# Altium PCB ComboCamera_OV2640.PcbDoc (part 1 of 2)
Units mm, origin at the board's own origin, x right, y up, seen from the top; angles counter-clockwise.
Board outline 54.59 x 25.9 mm, 4 copper layers (L1, L2, L3, L4), stack 1.562 mm thick; 63 components, 49 nets, 203 pads, 112 vias.
Unrouted connection lines stored in the file: 172.
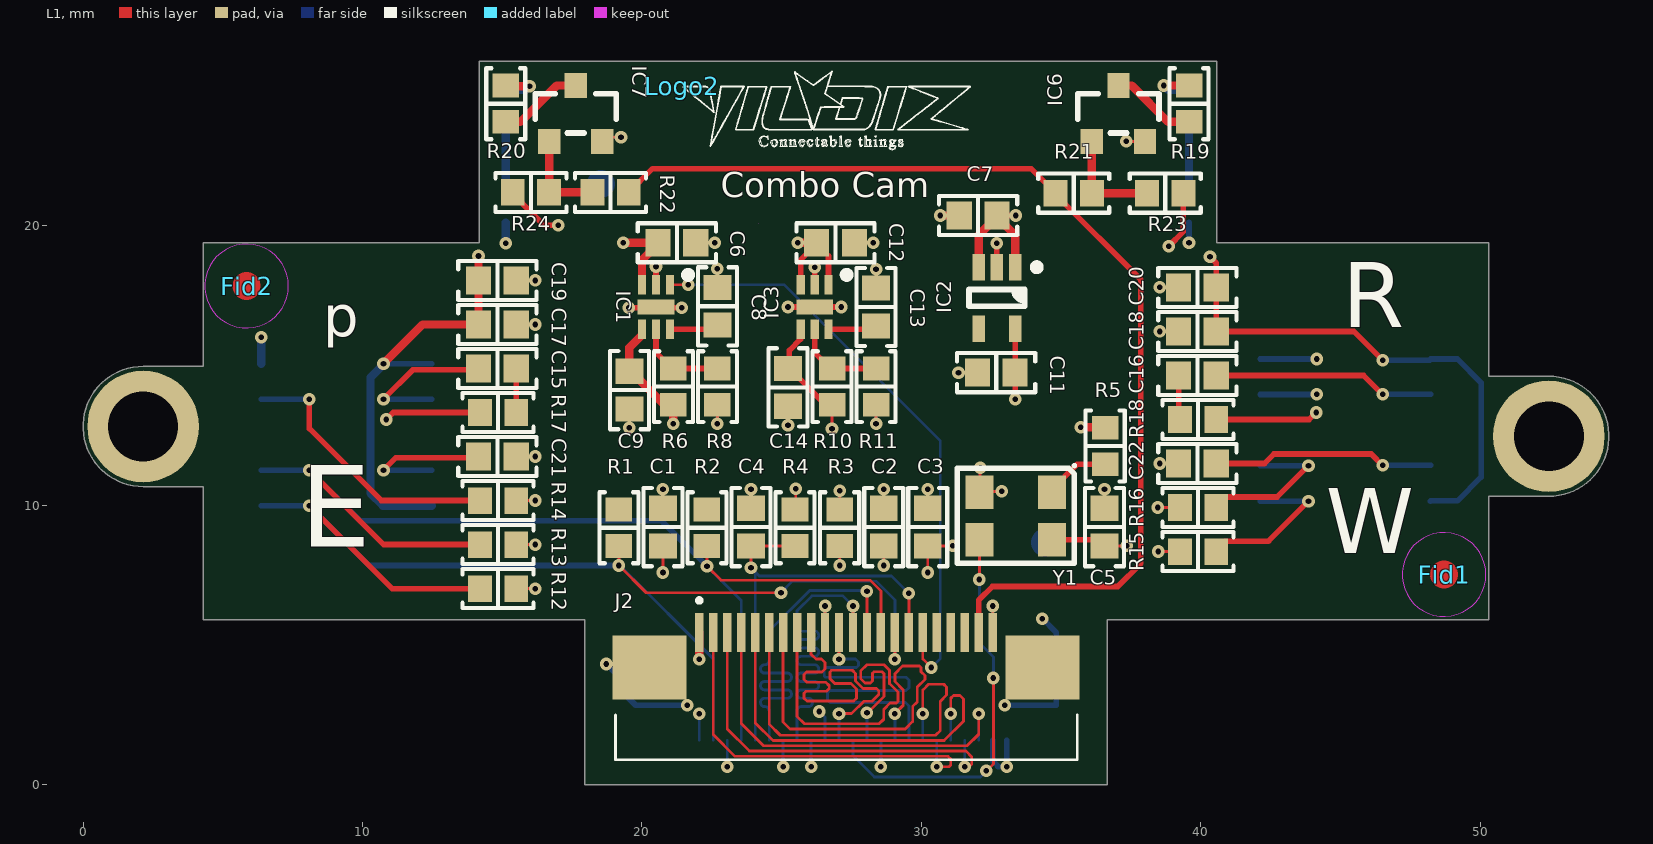
[diagram p0: L1 view]
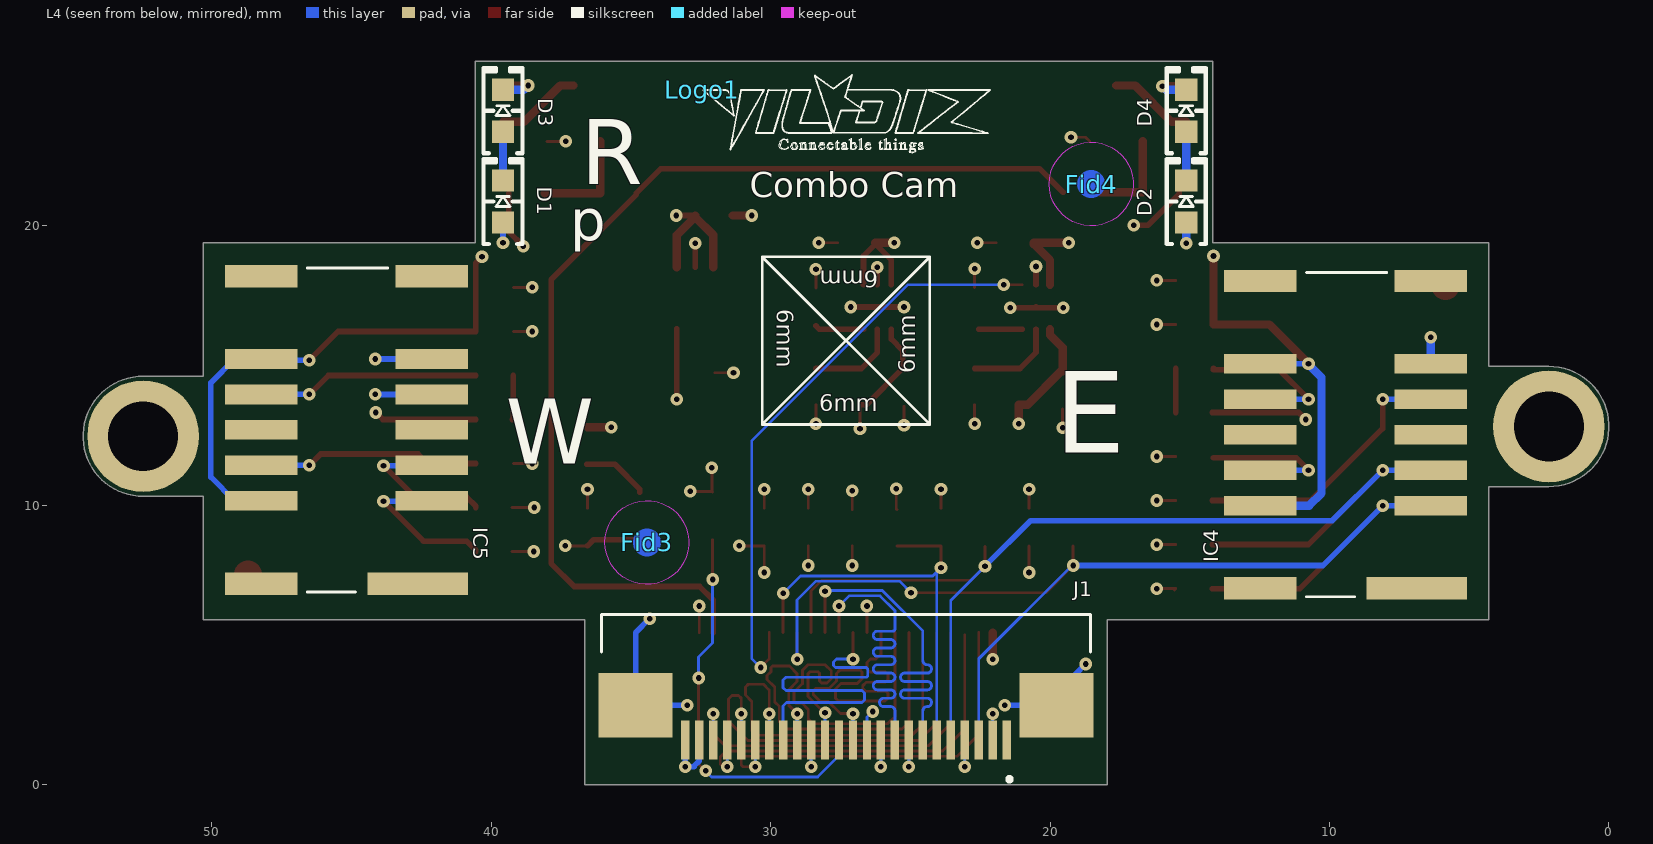
[diagram p1: L4 view, seen from below]
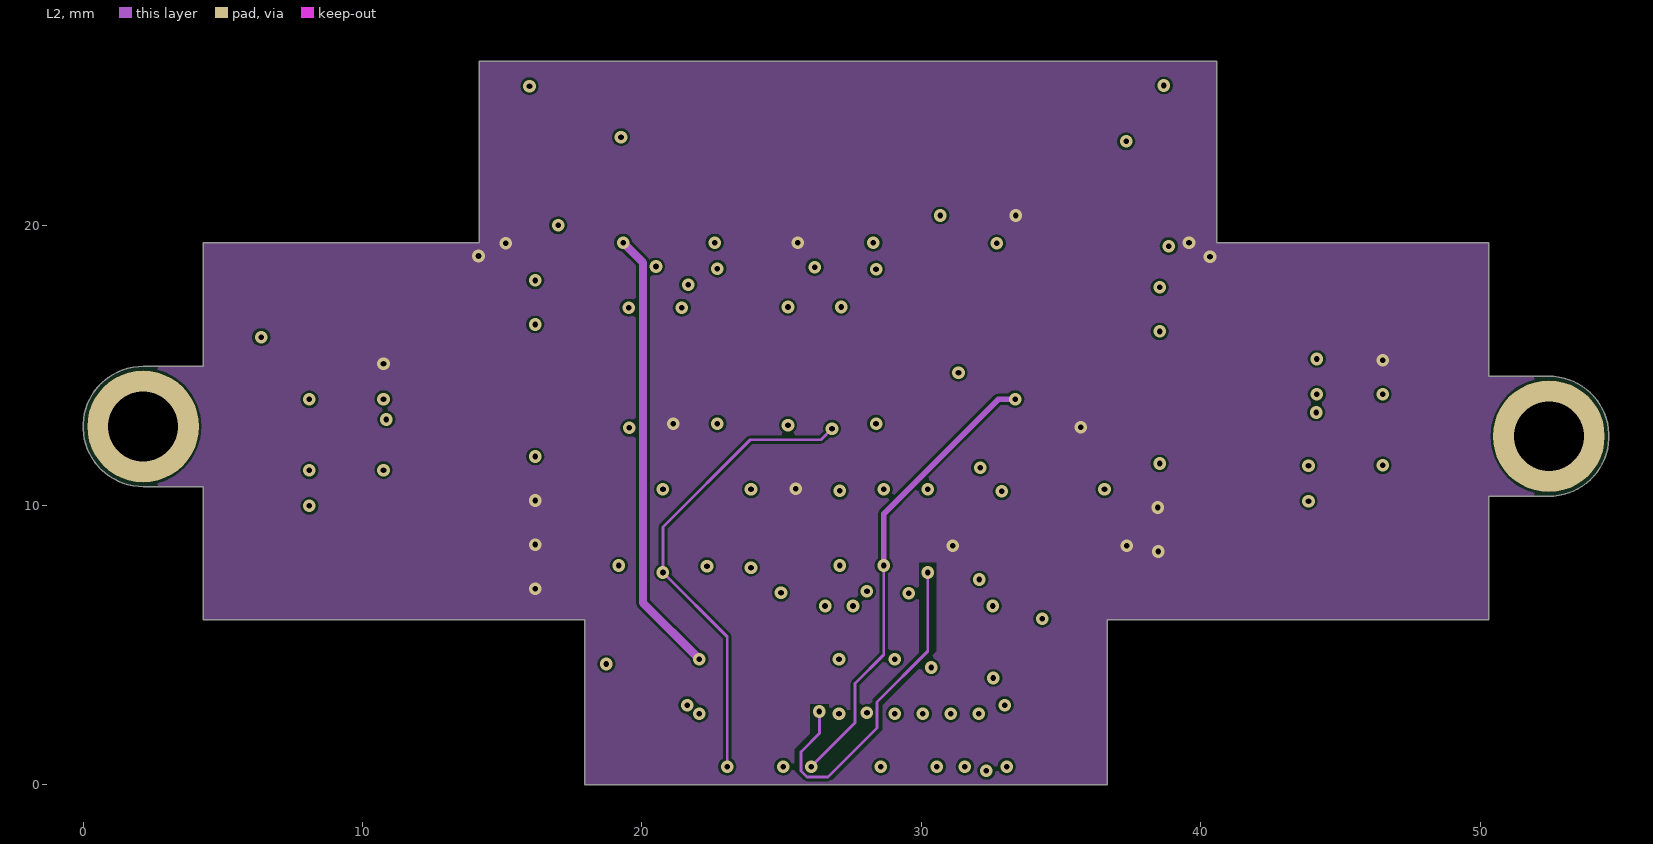
[diagram p2: L2]
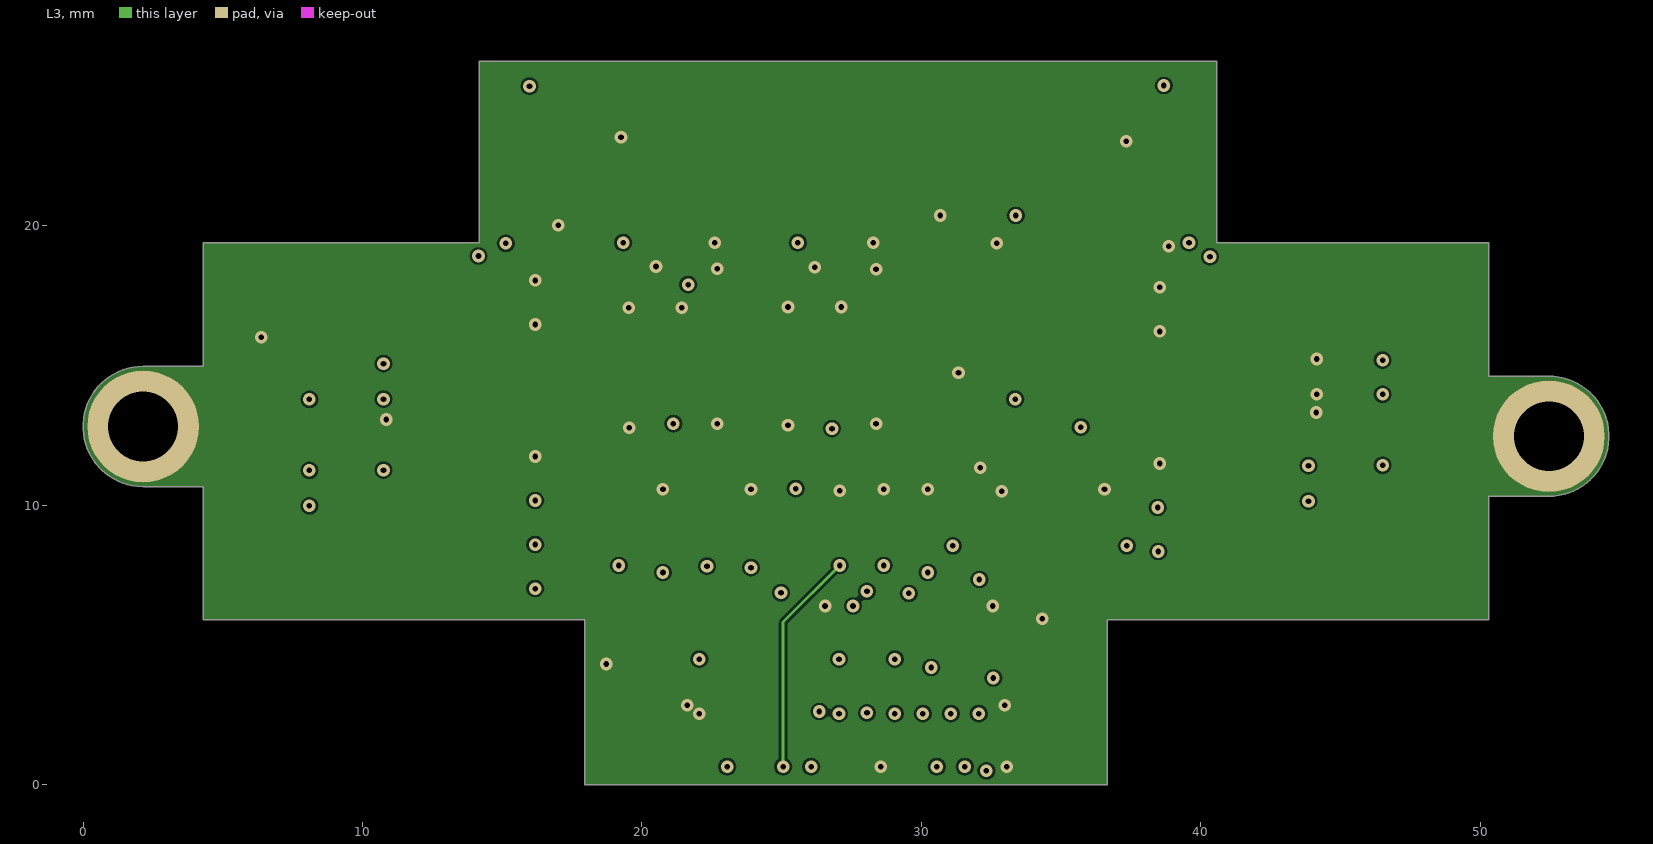
[diagram p3: L3]
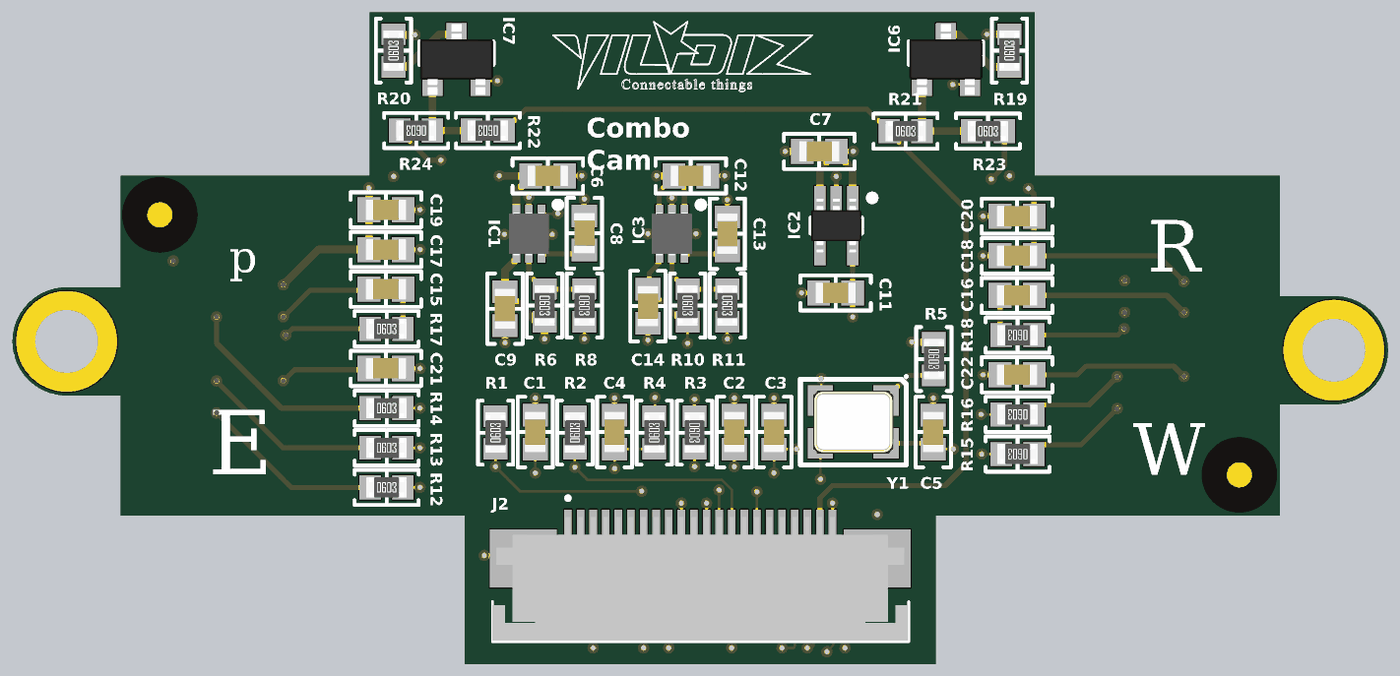
[diagram p4: 3D render of the assembled board from above, using the file's embedded part models]
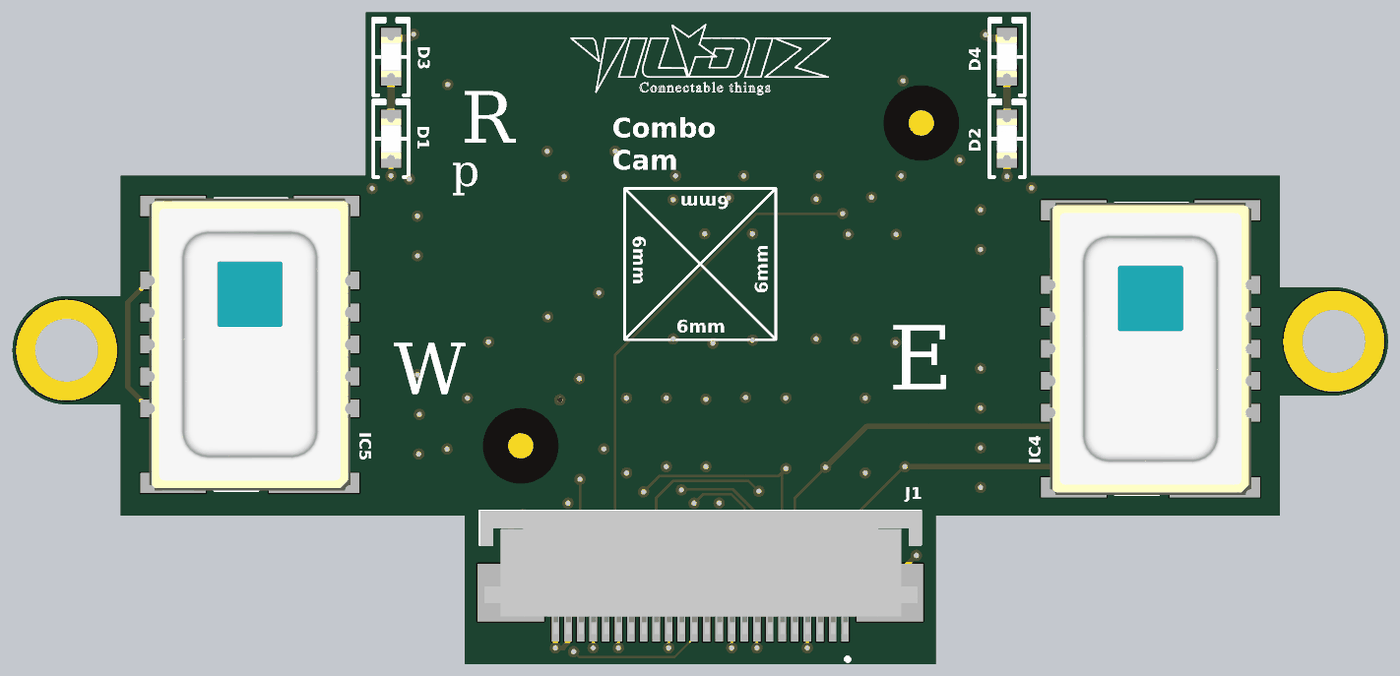
[diagram p5: 3D render of the assembled board from below, using the file's embedded part models]

## Layer stack, top to bottom
Top Solder: solder mask 0.0102, Solder Resist, Dk 3.5
L1: signal copper 0.035
Prepreg 1: prepreg 0.1, 2313, Dk 4.05
L2: signal copper 0.0175
Core 1: core 0.565, Core-009, Dk 4.5
Prepreg 2: prepreg 0.127, 2116, Dk 4.25
Core 2: core 0.565, Core-009, Dk 4.5
L3: signal copper 0.0175
Prepreg 3: prepreg 0.1, 2313, Dk 4.05
L4: signal copper 0.035
Bottom Solder: solder mask 0.0102, Solder Resist, Dk 3.5

## Board outline
4.3,5.9 4.3,10.675 2.15,10.675 cw(c2.15,12.825) 2.15,14.975 4.3,14.975 4.3,19.4 14.175,19.4 14.175,25.9 40.575,25.9 40.575,19.4 50.3,19.4 50.3,14.625 52.45,14.625 cw(c52.45,12.475) 52.45,10.325 50.3,10.325 50.3,5.9 36.65,5.9 36.65,0 17.95,0 17.95,5.9

## Design rules (kind name [scope] priority, off if disabled: settings)
Clearance [All] p1: gap=0.089 ignorepadtopadclearanceinfootprint=FALSE
ComponentClearance [All] p1: gap=0 collisioncheckmode=3 verticalgap=0 showdistances=FALSE
MatchedLengths "Schematic Matched Net Lengths" [InNetClass('DCMI')] p1: tolerance=2.54 checknetsindiffpair=FALSE checkdiffpairvsdiffpair=TRUE checkxsignals=TRUE checkothers=TRUE
PolygonConnect [All] p1: connectstyle=Direct reliefconductorwidth=0.254 reliefentries=4 polygonreliefangle="90 Angle" airgapwidth=0.254
RoutingVias [All] p1: holewidth=0.2 width=0.45 viastyle="Through Hole" minholewidth=0.2 minwidth=0.45 maxholewidth=5 maxwidth=5
SolderMaskExpansion [All] p1: expansion=0.05
Width [All] p1: maxlimit=10 minlimit=0.089 preferedwidth=0.2
29 further rules are at their usual default settings.

## Classes and differential pairs
component class ComboCamera_OV2640: Fid1 Fid2 Fid3 Fid4 Logo1 Logo2
net class DCMI: DCMI_D0 DCMI_D1 DCMI_D2 DCMI_D3 DCMI_D4 DCMI_D5 DCMI_D6 DCMI_D7 DCMI_HSYNC DCMI_PIXCK DCMI_VSYNC
net class DCMI_D[0..7]: DCMI_D0 DCMI_D1 DCMI_D2 DCMI_D3 DCMI_D4 DCMI_D5 DCMI_D6 DCMI_D7
net class D[0..7]: D0 D1 D2 D3 D4 D5 D6 D7
component class "U_Thermal Camera": C15 C16 C17 C18 C19 C20 C21 C22 IC4 IC5 R12 R13 R14 R15 R16 R17 R18
component class U_Power: C6 C7 C8 C9 C11 C12 C13 C14 IC1 IC2 IC3 R6 R8 R10 R11
component class U_LED: D1 D2 D3 D4 IC6 IC7 R19 R20 R21 R22 R23 R24
component class U_Expansion: J2
component class "U_Digital Camera": C1 C2 C3 C4 C5 J1 R1 R2 R3 R4 R5 Y1

## Components (designator, comment, footprint, x,y, rotation, side; value= is the part's Value field where it differs from the comment)
C1 "100nF" "CAP 0603/1608" 20.75,9.225 r270 top
C2 "100nF" "CAP 0603/1608" 28.65,9.225 r270 top
C3 "100nF" "CAP 0603/1608" 30.225,9.225 r270 top
C4 "100nF" "CAP 0603/1608" 23.9,9.225 r270 top
C5 "100nF" "CAP 0603/1608" 36.55,9.225 r270 top
C6 "1uF" "CAP 0603/1608" 21.25,19.4 r180 top
C7 "1uF" "CAP 0603/1608" 32.025,20.375 r0 top
C8 "100nF" "CAP 0603/1608" 22.7,17.125 r270 top
C9 "1uF" "CAP 0603/1608" 19.55,14.125 r90 top
C11 "1uF" "CAP 0603/1608" 32.675,14.75 r0 top
C12 "1uF" "CAP 0603/1608" 26.925,19.4 r180 top
C13 "100nF" "CAP 0603/1608" 28.375,17.1 r270 top
C14 "1uF" "CAP 0603/1608" 25.225,14.225 r90 top
C15 "1uF" "CAP 0603/1608" 14.825,14.9 r180 top
C16 "1uF" "CAP 0603/1608" 39.875,14.65 r0 top
C17 "100nF" "CAP 0603/1608" 14.825,16.475 r0 top
C18 "100nF" "CAP 0603/1608" 39.875,16.225 r180 top
C19 "10uF" "CAP 0603/1608" 14.825,18.05 r180 top
C20 "10uF" "CAP 0603/1608" 39.875,17.8 r0 top
C21 "1.5uF" "CAP 0603/1608" 14.825,11.75 r0 top
C22 "1.5uF" "CAP 0603/1608" 39.875,11.5 r180 top
D1 "#NAME?" "LED 0603/1608" 39.575,20.875 r90 bottom
D2 "#NAME?" "LED 0603/1608" 15.125,20.875 r90 bottom
D3 "#NAME?" "LED 0603/1608" 39.575,24.125 r90 bottom
D4 "#NAME?" "LED 0603/1608" 15.125,24.125 r90 bottom
Fid1 "Fiducial mark" Fiducial 48.7,7.525 r0 top
Fid2 "Fiducial mark" Fiducial 5.85,17.85 r90 top
Fid3 "Fiducial mark" Fiducial 34.425,8.675 r90 bottom
Fid4 "Fiducial mark" Fiducial 18.525,21.5 r90 bottom
IC1 "#NAME?" "MICREL MLF-6 1.6x1.6MM" 20.5,17.1 r270 top
IC2 "#NAME?" "MICROCHIP SC70-5 LT" 32.7,17.425 r270 top
IC3 "#NAME?" "MICREL MLF-6 1.6x1.6MM" 26.175,17.1 r270 top
IC4 "#NAME?" "PANASONIC AMG8853" 9.425,12.53 r90 bottom locked
IC5 "#NAME?" "PANASONIC AMG8853" 45.175,12.7 r90 bottom locked
IC6 "#NAME?" "DIODES SOT-23-3" 37.05,24.025 r90 top
IC7 "#NAME?" "DIODES SOT-23-3" 17.625,24.025 r90 top
J1 "#NAME?" "Amphenol SFV24R-1STE1HLF" 27.3,4 r0 bottom locked
J2 "#NAME?" fpc-22 27.3,4.825 r0 top locked
Logo1 "Logo symbol" LOGO_YILDIZIOT 32.45,24.875 r180 bottom
Logo2 "Logo symbol" LOGO_YILDIZIOT 21.434,24.998 r0 top
R1 "1.5kR" "RES 0603/1608" 19.175,9.2 r90 top
R2 "1.5kR" "RES 0603/1608" 22.325,9.2 r90 top
R3 "10kR" "RES 0603/1608" 27.075,9.2 r270 top
R4 "10kR" "RES 0603/1608" 25.475,9.2 r90 top
R5 "10kR" "RES 0603/1608" 36.575,12.125 r270 top
R6 "14kR" "RES 0603/1608" 21.125,14.25 r270 top
R8 "10kR" "RES 0603/1608" 22.7,14.25 r270 top
R10 "12.4kR" "RES 0603/1608" 26.8,14.25 r270 top
R11 "10kR" "RES 0603/1608" 28.375,14.25 r270 top
R12 "10kR" "RES 0603/1608" 14.85,7.025 r0 top
R13 "10kR" "RES 0603/1608" 14.85,8.6 r0 top
R14 "10kR" "RES 0603/1608" 14.85,10.175 r0 top
R15 "10kR" "RES 0603/1608" 39.9,8.35 r180 top
R16 "10kR" "RES 0603/1608" 39.9,9.925 r180 top
R17 "20R" "RES 0603/1608" 14.85,13.325 r0 top
R18 "20R" "RES 0603/1608" 39.9,13.075 r180 top
R19 "10R" "RES 0603/1608" 39.575,24.375 r90 top
R20 "10R" "RES 0603/1608" 15.125,24.375 r90 top
R21 "220R" "RES 0603/1608" 35.45,21.175 r0 top
R22 "220R" "RES 0603/1608" 18.875,21.2 r180 top
R23 "10kR" "RES 0603/1608" 38.725,21.175 r0 top
R24 "10kR" "RES 0603/1608" 16.025,21.2 r180 top
Y1 "24MHz" "Abracon ASTX-11" 33.375,9.625 r180 top

## Footprints (in the part's own frame and the unit in brackets; to place one, negate y for a bottom-side part, rotate by r counter-clockwise, add the part's x,y. Pads: shape width x height; smd on the part's side, far side on the other; paste and mask are expansions set on the pad)
"Abracon ASTX-11" [mm] "Crystal, 4-Leads, Body 2.50x3.20mm, Pitch 2.38mm, IPC Medium Density"
  rect 1x1.2 smd: 1(-1.3,-0.85) 2(1.3,-0.85) 3(1.3,0.85) 4(-1.3,0.85)
  silkscreen extent -2.15,-1.85 2.1,1.7, body extent -1.61,-1.26 1.61,1.26, height 0.9
"Amphenol SFV24R-1STE1HLF" [mm]
  rect 0.3x1.4 smd: 1(-5.75,2.4) 2(-5.25,2.4) 3(-4.75,2.4) 4(-4.25,2.4) 5(-3.75,2.4) 6(-3.25,2.4) 7(-2.75,2.4) 8(-2.25,2.4) 9(-1.75,2.4) 10(-1.25,2.4) 11(-0.75,2.4) 12(-0.25,2.4) 13(0.25,2.4) 14(0.75,2.4) 15(1.25,2.4) 16(1.75,2.4) 17(2.25,2.4) 18(2.75,2.4) 19(3.25,2.4) 20(3.75,2.4) 21(4.25,2.4) 22(4.75,2.4) 23(5.25,2.4) 24(5.75,2.4)
  rect 2.65x2.3 smd: MP1(-7.525,1.15) MP2(7.525,1.15)
  silkscreen extent -8.75,-2.1 8.75,3.85, body extent -8.78,-2.1 8.72,2.8, height 1.85
"CAP 0603/1608" [mm] "Chip Capacitor, 2-Leads, Body 1.60x0.80mm, IPC Medium Density"
  rect 0.9x1 smd: 1(-0.675,0) 2(0.675,0)
  silkscreen extent -1.4,-0.7 1.4,0.7, body extent -0.8,-0.41 0.8,0.41, height 0.82
"DIODES SOT-23-3" [mm] "SOT23, 3-Leads, Body 2.90x2.40mm, Pitch 0.95mm, IPC Medium Density"
  rect 0.9x0.8 smd: 1(-1,0.95) 2(-1,-0.95) 3(1,0)
  silkscreen extent -0.7,-1.45 0.7,1.45, body extent -1.41,-1.45 1.41,1.45, height 1.5
Fiducial [mm] "Electrolitic Radial Capacitor, 5mm pin space, 0.8mm Hole, 10.1mm diametre, 15.2 height"
  L1 circle w1: c0,0 r0
  L1 keep-out circle w0.01: c0,0 r1.5
fpc-22 [mm] "SFV22R-2STE1HLF"
  rect 0.3x1.4 smd: 1(-5.25,0.625) 2(-4.75,0.625) 3(-4.25,0.625) 4(-3.75,0.625) 5(-3.25,0.625) 6(-2.75,0.625) 7(-2.25,0.625) 8(-1.75,0.625) 9(-1.25,0.625) 10(-0.75,0.625) 11(-0.25,0.625) 12(0.25,0.625) 13(0.75,0.625) 14(1.25,0.625) 15(1.75,0.625) 16(2.25,0.625) 17(2.75,0.625) 18(3.25,0.625) 19(3.75,0.625) 20(4.25,0.625) 21(4.75,0.625) 22(5.25,0.625)
  rect 2.65x2.3 smd: MP1(-7.025,-0.625) MP2(7.025,-0.625)
  silkscreen extent -8.25,-3.93 8.27,1.82, body extent -8.25,-3.88 8.25,1.02, height 1.82
"LED 0603/1608" [mm] "Chip Diode, 2-Leads, Body 1.60x0.80mm, IPC Medium Density"
  rect 0.8x0.8 smd: 1(-0.75,0) 2(0.75,0)
  silkscreen extent -1.52,-0.7 1.52,0.7, body extent -0.8,-0.4 0.8,0.4, height 0.53
LOGO_YILDIZIOT [mm] "YýLDýZ IoT Logo"
  silkscreen extent 0.02,-2.27 10.31,0.53
"MICREL MLF-6 1.6x1.6MM" [mm] "6-UFDFN Exposed Pad, 6-TMLF®"
  rect 0.7x0.3 smd: 1(-0.8,0.5) 2(-0.8,0) 3(-0.8,-0.5) 4(0.8,-0.5) 5(0.8,0) 6(0.8,0.5)
  rect 0.55x1.31 smd: 7(0,0)
  silkscreen extent -1.27,1.03 -1.03,1.28, body extent -0.85,-0.8 0.85,0.8, height 0.6
"MICROCHIP SC70-5 LT" [mm] "SC70, 5-Leads, Body 2.03x2.10mm, Pitch 0.65mm, IPC Medium Density"
  rect 0.95x0.45 smd: 1(-1.1,0.65) 2(-1.1,0) 3(-1.1,-0.65) 4(1.1,-0.65) 5(1.1,0.65)
  silkscreen extent -1.22,-1 0.3,1.55, body extent -1.06,-1 1.06,1, height 1.1
"PANASONIC AMG8853" [mm]
  rect 0.8x3.6 smd: 1(-5.5,-2.55)
  rect 0.7x2.6 smd: 2(-2.54,-3.05) 3(-1.27,-3.05) 4(0,-3.05) 5(1.27,-3.05) 6(2.54,-3.05) 9(2.54,3.05) 10(1.27,3.05) 11(0,3.05) 12(-1.27,3.05) 13(-2.54,3.05)
  rect 0.8x2.6 smd: 7(5.5,-3.05) 8(5.5,3.05) 14(-5.5,3.05)
  silkscreen extent -5.8,-1.47 5.8,1.4, body extent -5.8,-4 5.8,4, height 4.3
"RES 0603/1608" [mm] "Chip Resistor, 2-Leads, Body 1.60x0.80mm, IPC Medium Density"
  rect 0.85x0.95 smd: 1(-0.65,0) 2(0.65,0)
  silkscreen extent -1.27,-0.7 1.27,0.7, body extent -0.8,-0.4 0.8,0.4, height 0.45

## Part data
C1 C2 C3 C4 C5 C8 C13 C17 C18: library part "Capacitor - Ceramic", "Ceramic, SMT Capacitor", Case/Package=0603, Case Code (Metric)=1608, Dielectric=X7R, Manufacturer=Samsung, Manufacturer Part Number=CL10B104JB8NNNC, Max Operating Temperature=125°C, Min Operating Temperature=-55°C, Package Quantity=1, Supplier Part Number 1=1276-1033-1-ND, Tolerance=5%, Voltage=50V, Capacitance=100nF, Case Code (Imperial)=0603, ComponentLink1Description=https://media.digikey.com/pdf/Data%20Sheets/Samsung%20PDFs/CL_Series_MLCC_ds.pdf?src-supplier=Digi-Key, ComponentLink1URL=https://media.digikey.com/pdf/Data%20Sheets/Samsung%20PDFs/CL_Series_MLCC_ds.pdf?src-supplier=Digi-Key, ComponentLink2Description=https://www.verical.com/server-webapp/html/getDatasheet?partID=359321&src-supplier=Verical, ComponentLink2URL=https://www.verical.com/server-webapp/html/getDatasheet?partID=359321&src-supplier=Verical, ComponentLink3Description=http://www1.futureelectronics.com/doc/SAMSUNG/CL10B104JB8NNNC.pdf?src-supplier=Future+Electronics, ComponentLink3URL=http://www1.futureelectronics.com/doc/SAMSUNG/CL10B104JB8NNNC.pdf?src-supplier=Future+Electronics, ComponentLink4Description=https://produktinfo.conrad.com/datenblaetter/450000-474999/456613-da-01-en-VS_KONDENSATOR_0603.pdf?src-supplier=Conrad, ComponentLink4URL=https://produktinfo.conrad.com/datenblaetter/450000-474999/456613-da-01-en-VS_KONDENSATOR_0603.pdf?src-supplier=Conrad, Contact Plating=Tin, Depth=0.8mm, Height=0.8mm, Length=1.6mm, Material=Ceramic, Mount="Surface Mount", Packaging="Tape and Reel", Pricing 1="1 = 0,10000, 10 = 0,05300, 100 = 0,02350, 500 = 0,01680, 1000 = 0,01320 (USD)", Radiation Hardening=No, RoHS=Yes, Stock 1=223594, Supplier 1=Digi-Key, Thickness=0.035inch, Voltage Rating=50V, Width=0.031inch
C6 C7 C9 C11 C12 C14 C15 C16: library part "Capacitor - Ceramic", "Ceramic, SMT Capacitor", Case/Package=0603, Case Code (Metric)=1608, Dielectric=X5R, Manufacturer=Samsung, Manufacturer Part Number=CL10A105KP8NNNC, Max Operating Temperature=85°C, Min Operating Temperature=-55°C, Package Quantity=1, Supplier Part Number 1=1276-1182-1-ND, Tolerance=10%, Voltage=10V, Capacitance=1uF, Case Code (Imperial)=0603, ComponentLink1Description=https://datasheet.ciiva.com/15195/getdatasheetpartid-358616-15195708.pdf?src-supplier=Verical, ComponentLink1URL=https://datasheet.ciiva.com/15195/getdatasheetpartid-358616-15195708.pdf?src-supplier=Verical, ComponentLink2Description=https://datasheet.ciiva.com/16358/cl05b104kq5nnnc-16358431.pdf?src-supplier=Future+Electronics, ComponentLink2URL=https://datasheet.ciiva.com/16358/cl05b104kq5nnnc-16358431.pdf?src-supplier=Future+Electronics, Contact Plating=Tin, Depth=0.8mm, Height=0.8mm, Length=1.6mm, Mount="Surface Mount", Packaging="Tape and Reel", Pricing 1="1 = 0,10000, 10 = 0,03800, 100 = 0,01680, 500 = 0,01200, 1000 = 0,00943 (USD)", Radiation Hardening=No, RoHS=Yes, Stock 1=4590831, Supplier 1=Digi-Key, Thickness=0.035inch, Voltage Rating=10V, Width=0.031inch
C19 C20: library part "Capacitor - Ceramic", "Ceramic, SMT Capacitor", Case/Package=0603, Case Code (Metric)=1608, Dielectric=X5R, Manufacturer=Samsung, Manufacturer Part Number=CL10A106MQ8NNNC, Max Operating Temperature=85°C, Min Operating Temperature=-55°C, Package Quantity=1, Supplier Part Number 1=1276-1119-1-ND, Tolerance=20%, Voltage=6.3V, Capacitance=10uF, Case Code (Imperial)=0603, ComponentLink1Description=https://datasheet.ciiva.com/25798/cl10a106mq8nnnc-25798320.pdf?src-supplier=Digi-Key, ComponentLink1URL=https://datasheet.ciiva.com/25798/cl10a106mq8nnnc-25798320.pdf?src-supplier=Digi-Key, ComponentLink2Description=https://datasheet.ciiva.com/26838/getdatasheetpartid-357557-26838347.pdf?src-supplier=Verical, ComponentLink2URL=https://datasheet.ciiva.com/26838/getdatasheetpartid-357557-26838347.pdf?src-supplier=Verical, ComponentLink3Description=https://datasheet.ciiva.com/16437/cl05b104kq5nnnc-16437327.pdf?src-supplier=Future+Electronics, ComponentLink3URL=https://datasheet.ciiva.com/16437/cl05b104kq5nnnc-16437327.pdf?src-supplier=Future+Electronics, Contact Plating=Tin, Depth=0.8mm, Height=0.8mm, Length=1.6mm, Mount="Surface Mount", Packaging="Tape and Reel", Pricing 1="1 = 0,15000, 10 = 0,11000, 100 = 0,05150, 500 = 0,03614, 1000 = 0,02992 (USD)", Radiation Hardening=No, RoHS=Yes, Stock 1=4408315, Supplier 1=Digi-Key, Thickness=0.035inch, Voltage Rating=6.3V, Width=0.031inch
C21 C22: library part "Capacitor - Ceramic", "Ceramic, SMT Capacitor", Case/Package=0603, Case Code (Metric)=1608, Manufacturer=TDK, Manufacturer Part Number=C1608X7S1C155K080AC, Max Operating Temperature=125°C, Min Operating Temperature=-55°C, Supplier Part Number 1=445-174769-1-ND, Tolerance=10%, Voltage Rating=16V, Capacitance=1.5uF, Case Code (Imperial)=0603, ComponentLink1Description=https://datasheet.ciiva.com/15195/getdatasheetpartid-358616-15195708.pdf?src-supplier=Verical, ComponentLink1URL=https://datasheet.ciiva.com/15195/getdatasheetpartid-358616-15195708.pdf?src-supplier=Verical, ComponentLink2Description=https://datasheet.ciiva.com/16358/cl05b104kq5nnnc-16358431.pdf?src-supplier=Future+Electronics, ComponentLink2URL=https://datasheet.ciiva.com/16358/cl05b104kq5nnnc-16358431.pdf?src-supplier=Future+Electronics, ComponentLink3Description=https://product.tdk.com/info/en/catalog/spec/mlccspec_commercial_general_midvoltage_en.pdf?src-supplier=Digi-Key, ComponentLink3URL=https://product.tdk.com/info/en/catalog/spec/mlccspec_commercial_general_midvoltage_en.pdf?src-supplier=Digi-Key, ComponentLink4Description=https://product.tdk.com/info/en/catalog/datasheets/mlcc_commercial_general_en.pdf?src-supplier=Digi-Key, ComponentLink4URL=https://product.tdk.com/info/en/catalog/datasheets/mlcc_commercial_general_en.pdf?src-supplier=Digi-Key, Mount="Surface Mount", Packaging="Tape and Reel", Pricing 1="1 = 0,23000, 10 = 0,15900, 100 = 0,09030, 500 = 0,06376, 1000 = 0,05579 (USD)", RoHS=No, Stock 1=2796, Supplier 1=Digi-Key
D1 D3: library part LED, "Chip LED", Manufacturer="Wurth Electronics", Manufacturer Part Number=15406085BA300, Supplier Part Number 1=732-12005-1-ND, ComponentLink1Description=http://katalog.we-online.de/pbs/datasheet/15406085BA300.pdf?src-supplier=Digi-Key, ComponentLink1URL=http://katalog.we-online.de/pbs/datasheet/15406085BA300.pdf?src-supplier=Digi-Key, Pricing 1="1 = 0,60000, 10 = 0,54200, 100 = 0,50400, 500 = 0,46600, 1000 = 0,42800 (USD)", RoHS=No, Stock 1=3808, Supplier 1=Digi-Key
D2 D4: library part LED, "Chip LED", Case/Package=0603, Case Code (Metric)=1608, Color=White, Forward Voltage=3V, Lens Color=Clear, Manufacturer=Inolux, Manufacturer Part Number=IN-S63AT5UW, Supplier Part Number 1=1830-1063-1-ND, Test Current=5mA, Case Code (Imperial)=0603, ComponentLink1Description=http://katalog.we-online.de/pbs/datasheet/15406085BA300.pdf?src-supplier=Digi-Key, ComponentLink1URL=http://katalog.we-online.de/pbs/datasheet/15406085BA300.pdf?src-supplier=Digi-Key, ComponentLink2Description=http://www.inolux-corp.com/datasheet/SMDLED/Mono%20Color%20Top%20View/IN-S63AT%20Series_V1.1.pdf?src-supplier=Digi-Key, ComponentLink2URL=http://www.inolux-corp.com/datasheet/SMDLED/Mono%20Color%20Top%20View/IN-S63AT%20Series_V1.1.pdf?src-supplier=Digi-Key, Height=0.4mm, Length=1.6mm, Lens Size=0.8mm, Lens Style=Flat, Lens Transparency=Clear, Luminous Intensity=900mcd, Mount="Surface Mount", Packaging="Tape and Reel", Pricing 1="1 = 0,33000, 10 = 0,24000, 100 = 0,11360, 500 = 0,07576, 1000 = 0,05934 (USD)", RoHS=No, Stock 1=44672, Supplier 1=Digi-Key, Viewing Angle=120°, Width=0.8mm
Fid1 Fid2 Fid3 Fid4: "Fiducial Mark", Part Number=Fid-Mark, Artikkelnr Noca=N.A., Artikkelnr Simpro=N.A., Footprint Doc=Fiducial, LatestRevisionDate=2009-12-12, Pin Count=1, Published=2009-12-12, Publisher="Nordic Semiconductor"
IC1 IC3: library part "MICROCHIP MIC5353", "Integrated Circuit", Manufacturer=Microchip, Manufacturer Part Number=MIC5353YMT-TR, Supplier Part Number 1=576-3681-1-ND, ComponentLink1Description=http://www.farnell.com/datasheets/2245202.pdf?src-supplier=Farnell, ComponentLink1URL=http://www.farnell.com/datasheets/2245202.pdf?src-supplier=Farnell, ComponentLink2Description=http://www.microchip.com/mymicrochip/filehandler.aspx?ddocname=en579989&src-supplier=Digi-Key, ComponentLink2URL=http://www.microchip.com/mymicrochip/filehandler.aspx?ddocname=en579989&src-supplier=Digi-Key, ComponentLink3Description=http://www.farnell.com/datasheets/1692673.pdf?src-supplier=Element14, ComponentLink3URL=http://www.farnell.com/datasheets/1692673.pdf?src-supplier=Element14, ComponentLink4Description=https://datasheet.ciiva.com/2049/mic5353-2049344.pdf?src-supplier=Digi-Key, ComponentLink4URL=https://datasheet.ciiva.com/2049/mic5353-2049344.pdf?src-supplier=Digi-Key, ComponentLink5Description=https://datasheet.ciiva.com/2049/mic5353-2049342.pdf?src-supplier=Digi-Key, ComponentLink5URL=https://datasheet.ciiva.com/2049/mic5353-2049342.pdf?src-supplier=Digi-Key, ComponentLink6Description=https://datasheet.ciiva.com/2049/mic5353-2049343.pdf?src-supplier=Digi-Key, ComponentLink6URL=https://datasheet.ciiva.com/2049/mic5353-2049343.pdf?src-supplier=Digi-Key, Pricing 1="1 = 0,34000, 25 = 0,28000, 100 = 0,26000 (USD)", RoHS=Yes, Stock 1=1004, Supplier 1=Digi-Key
IC2: library part "MICROCHIP MIC5365/6-xxYC", "High perfonmance 150mA LDO", Manufacturer=Microchip, Manufacturer Part Number=MIC5365-1.2YC5-TR, Supplier Part Number 1=576-3175-1-ND, ComponentLink1Description=https://datasheet.ciiva.com/16461/mic5365-16461882.pdf?src-supplier=Future+Electronics, ComponentLink1URL=https://datasheet.ciiva.com/16461/mic5365-16461882.pdf?src-supplier=Future+Electronics, Pricing 1="1 = 0,12000, 25 = 0,10000, 100 = 0,09000 (USD)", RoHS=Yes, Stock 1=6440, Supplier 1=Digi-Key
IC4 IC5: library part "Panasonic AMG8833", "The Panasonic Electric Works' Grid Eye is a thermopile-type infrared sensor with digital communication. Using advanced MEMS technology, the Grid Eye monitors the quantity of infrared rays for 64 pixels of data. This page describes the internal memory structure that can be accessed through an I2C interface.", Case/Package=SMD/SMT, Manufacturer=Panasonic, Manufacturer Part Number=AMG8833, Max Operating Temperature=80°C, Min Operating Temperature=0°C, Supplier Part Number 1=P19002CT-ND, ComponentLink1Description=https://media.digikey.com/pdf/Data%20Sheets/Panasonic%20Sensors%20PDFs/Grid-EYE_AMG88.pdf?src-supplier=Digi-Key, ComponentLink1URL=https://media.digikey.com/pdf/Data%20Sheets/Panasonic%20Sensors%20PDFs/Grid-EYE_AMG88.pdf?src-supplier=Digi-Key, ComponentLink2Description=http://industrial.panasonic.com/cdbs/www-data/pdf/ADI8000/ADI8000C66.pdf?src-supplier=Newark, ComponentLink2URL=http://industrial.panasonic.com/cdbs/www-data/pdf/ADI8000/ADI8000C66.pdf?src-supplier=Newark, ComponentLink3Description=http://industrial.panasonic.com/cdbs/www-data/pdf/ADI8000/ADI8000C66.pdf?src-supplier=Farnell, ComponentLink3URL=http://industrial.panasonic.com/cdbs/www-data/pdf/ADI8000/ADI8000C66.pdf?src-supplier=Farnell, Output Type=I2C, Packaging="Tape and Reel", Pricing 1="1 = 32,50000, 5 = 31,02400, 10 = 28,06900, 25 = 25,85280, 50 = 22,89820 (USD)", RoHS=Yes, Sensing Method="Infrared (IR)", Stock 1=207, Supplier 1=Digi-Key
IC6 IC7: library part BSS138-7-F, "MOSFET N-CH 50V 200MA SOT23-3", Manufacturer=Nexperia, Manufacturer Part Number=BSS138P,215, Supplier Part Number 1=1727-1142-1-ND, ComponentLink1Description=Datasheet, ComponentLink1URL=https://www.diodes.com/assets/Datasheets/ds30144.pdf, ComponentLink2Description="DigiKey Link", ComponentLink2URL=http://digikey.com/product-detail/en/diodes-incorporated/BSS138-7-F/BSS138-FDICT-ND/717843, ComponentLink3Description=http://www.farnell.com/datasheets/923164.pdf?src-supplier=Farnell, ComponentLink3URL=http://www.farnell.com/datasheets/923164.pdf?src-supplier=Farnell, ComponentLink4Description=https://www.mouser.com/ds/2/302/BSS138P-114022.pdf?src-supplier=Mouser, ComponentLink4URL=https://www.mouser.com/ds/2/302/BSS138P-114022.pdf?src-supplier=Mouser, ComponentLink5Description=https://assets.nexperia.com/documents/data-sheet/BSS138P.pdf?src-supplier=Digi-Key, ComponentLink5URL=https://assets.nexperia.com/documents/data-sheet/BSS138P.pdf?src-supplier=Digi-Key, ComponentLink6Description=http://www.farnell.com/datasheets/923164.pdf?src-supplier=Newark, ComponentLink6URL=http://www.farnell.com/datasheets/923164.pdf?src-supplier=Newark, Pricing 1="1 = 0,16000, 10 = 0,14400, 25 = 0,13760, 100 = 0,06050, 250 = 0,05808, 500 = 0,04752, 1000 = 0,03300 (USD)", RoHS=No, Stock 1=720934, Supplier 1=Digi-Key
J1: library part FPC-24, "Connector", Current Rating=500mA, Flammability Rating="UL94 V-0", Insulation Resistance=100MR, Manufacturer="Amphenol FCI", Manufacturer Part Number=SFV24R-3STBE1HLF, Max Operating Temperature=105°C, Min Operating Temperature=-55°C, Package Quantity=6000, Supplier Part Number 1=609-5201-1-ND, Voltage Rating=50V, Actuator Material=Glass,Polyphenylene, ComponentLink1Description=http://portal.fciconnect.com/Comergent//fci/drawing/10116954.pdf?src-supplier=Digi-Key, ComponentLink1URL=http://portal.fciconnect.com/Comergent//fci/drawing/10116954.pdf?src-supplier=Digi-Key, ComponentLink2Description=https://cdn.amphenol-icc.com/media/wysiwyg/files/drawing/10116954.pdf?src-supplier=Digi-Key, ComponentLink2URL=https://cdn.amphenol-icc.com/media/wysiwyg/files/drawing/10116954.pdf?src-supplier=Digi-Key, Contact Location=Bottom, Contact Material=Bronze, Contact Plating=Gold, Housing Material=Polymer, Mount="Surface Mount", Number of Positions=24, Packaging="Tape and Reel", Pitch=0.02inch, Pricing 1="1 = 0,51000, 10 = 0,48200, 25 = 0,43400, 50 = 0,38580, 100 = 0,36960, 250 = 0,33748, 500 = 0,32142, 1000 = 0,26517 (USD)", RoHS=Yes, Stock 1=4525, Supplier 1=Digi-Key, Termination=Solder
J2: library part FPC-22, "Connector", Contact Resistance=30mR, Current Rating=500mA, Flammability Rating="UL94 V-0", Housing Color=Black, Insulation Resistance=100MR, Manufacturer="Amphenol FCI", Manufacturer Part Number=SFV22R-2STE1HLF, Max Operating Temperature=105°C, Max Voltage Rating (AC)=50V, Min Operating Temperature=-55°C, Package Quantity=3000, Supplier Part Number 1=609-4319-1-ND, Actuator Material=Glass,Polyphenylene, ComponentLink1Description=https://datasheet.ciiva.com/670/10112793-670003.pdf?src-supplier=Digi-Key, ComponentLink1URL=https://datasheet.ciiva.com/670/10112793-670003.pdf?src-supplier=Digi-Key, ComponentLink2Description=https://datasheet.ciiva.com/670/10112793-670004.pdf?src-supplier=Digi-Key, ComponentLink2URL=https://datasheet.ciiva.com/670/10112793-670004.pdf?src-supplier=Digi-Key, ComponentLink3Description=https://datasheet.ciiva.com/13704/10112793-13704492.pdf?src-supplier=Mouser, ComponentLink3URL=https://datasheet.ciiva.com/13704/10112793-13704492.pdf?src-supplier=Mouser, ComponentLink4Description=https://datasheet.ciiva.com/670/10112793-670005.pdf?src-supplier=Digi-Key, ComponentLink4URL=https://datasheet.ciiva.com/670/10112793-670005.pdf?src-supplier=Digi-Key, ComponentLink5Description=https://datasheet.ciiva.com/10368/10112793-10368190.pdf?src-supplier=Avnet, ComponentLink5URL=https://datasheet.ciiva.com/10368/10112793-10368190.pdf?src-supplier=Avnet, Contact Location=Top, Contact Material=Bronze, Contact Plating=Tin, Depth=4.9mm, Housing Material=Polymer, Length=16.5mm, Max Current Rating=500mA, Mount="Surface Mount", Number of Contacts=22, Number of Positions=22, Number of Rows=1, Orientation="Right Angle", Packaging="Tape and Reel", Pitch=0.5mm, Pricing 1="1 = 0,79000, 10 = 0,74300, 25 = 0,66840, 50 = 0,59420, 100 = 0,56950, 250 = 0,52000, 500 = 0,49522, 1000 = 0,40856 (USD)", Radiation Hardening=No, RoHS=Yes, Stock 1=2152, Supplier 1=Digi-Key, Termination=Solder, Voltage Rating=50V, Wire/Cable Type=Straight
Logo1 Logo2: library part Logo, "Schematic symbol for Logo"
R1 R2: library part Resistor_Chip, "Ceramic, SMT Capacitor", Case/Package=0603, Case Code (Metric)=1608, Manufacturer=Yageo, Manufacturer Part Number=RC0603FR-071K5L, Max Operating Temperature=155°C, Max Power Dissipation=100mW, Min Operating Temperature=-55°C, Package Quantity=1, Supplier Part Number 1=311-1.50KHRCT-ND, Temperature Coefficient=100ppm/°C, Tolerance=1%, Voltage Rating=50V, Case Code (Imperial)=0603, ComponentLink1Description=https://datasheet.ciiva.com/2454/pyu-r-int-thick-7-2454513.pdf?src-supplier=Digi-Key, ComponentLink1URL=https://datasheet.ciiva.com/2454/pyu-r-int-thick-7-2454513.pdf?src-supplier=Digi-Key, ComponentLink2Description=https://datasheet.ciiva.com/2454/pyu-r-int-thick-7-2454514.pdf?src-supplier=Digi-Key, ComponentLink2URL=https://datasheet.ciiva.com/2454/pyu-r-int-thick-7-2454514.pdf?src-supplier=Digi-Key, ComponentLink3Description=https://datasheet.ciiva.com/2454/pyu-r-int-thick-7-2454515.pdf?src-supplier=Digi-Key, ComponentLink3URL=https://datasheet.ciiva.com/2454/pyu-r-int-thick-7-2454515.pdf?src-supplier=Digi-Key, ComponentLink4Description=https://datasheet.ciiva.com/46440/1868787-46440895.pdf?src-supplier=Element14, ComponentLink4URL=https://datasheet.ciiva.com/46440/1868787-46440895.pdf?src-supplier=Element14, Composition="Thick Film", Depth=0.8mm, Features="Moisture Resistant", Height=0.022inch, Lead Free="Lead Free", Length=0.063inch, Military Standard=Not, Number of Pins=2, Number of Terminations=2, Packaging="Tape and Reel", Power Rating=100mW, Pricing 1="1 = 0,10000, 10 = 0,02300, 100 = 0,00940, 1000 = 0,00421, 2500 = 0,00366 (USD)", REACH SVHC="No SVHC", Resistance=1.5kR, RoHS=Yes, Stock 1=4073514, Supplier 1=Digi-Key, Termination=SMD/SMT, Voltage Rating (DC)=50V, Width=0.031inch
R3 R4 R5 R8 R11 R12 R13 R14 R15 R16 R23 R24: library part Resistor_Chip, "Ceramic, SMT Capacitor", Case/Package=0603, Case Code (Metric)=1608, Manufacturer="Stackpole Electronics", Manufacturer Part Number=RNCP0603FTD10K0, Max Operating Temperature=155°C, Max Power Dissipation=125mW, Min Operating Temperature=-55°C, Supplier Part Number 1=RNCP0603FTD10K0CT-ND, Temperature Coefficient=100ppm/°C, Tolerance=1%, Case Code (Imperial)=0603, Composition="Thin Film", Contact Plating=Matte,Tin, Features="Anti-Sulfur,Moisture Resistant", Height=0.02inch, Lead Free="Lead Free", Length=0.059inch, Mount="Surface Mount", Number of Terminations=2, Packaging="Tape and Reel", Pricing 1="1 = 0,10000, 10 = 0,06700, 100 = 0,02730, 1000 = 0,01224, 2500 = 0,01063 (USD)", Radiation Hardening=No, Resistance=10kR, RoHS=Yes, Stock 1=183083, Supplier 1=Digi-Key, Width=0.031inch
R6: library part Resistor_Chip, "Ceramic, SMT Capacitor", Case/Package=0603, Case Code (Metric)=1608, Manufacturer=Yageo, Manufacturer Part Number=RC0603FR-0714KL, Max Operating Temperature=155°C, Max Power Dissipation=100mW, Min Operating Temperature=-55°C, Package Quantity=1, Supplier Part Number 1=311-14.0KHRCT-ND, Temperature Coefficient=100ppm/°C, Tolerance=1%, Voltage Rating=75V, Voltage Rating (DC)=50V, Case Code (Imperial)=0603, ComponentLink1Description=https://datasheet.ciiva.com/15189/getdatasheetpartid-325152-15189610.pdf?src-supplier=Verical, ComponentLink1URL=https://datasheet.ciiva.com/15189/getdatasheetpartid-325152-15189610.pdf?src-supplier=Verical, ComponentLink2Description=https://datasheet.ciiva.com/2455/pyu-r-int-thick-7-2455089.pdf?src-supplier=Digi-Key, ComponentLink2URL=https://datasheet.ciiva.com/2455/pyu-r-int-thick-7-2455089.pdf?src-supplier=Digi-Key, ComponentLink3Description=https://datasheet.ciiva.com/2455/pyu-r-int-thick-7-2455090.pdf?src-supplier=Digi-Key, ComponentLink3URL=https://datasheet.ciiva.com/2455/pyu-r-int-thick-7-2455090.pdf?src-supplier=Digi-Key, ComponentLink4Description=https://datasheet.ciiva.com/2455/pyu-r-int-thick-7-2455091.pdf?src-supplier=Digi-Key, ComponentLink4URL=https://datasheet.ciiva.com/2455/pyu-r-int-thick-7-2455091.pdf?src-supplier=Digi-Key, Composition="Thick Film", Depth=0.8mm, Features="Moisture Resistant", Height=0.022inch, Lead Free="Lead Free", Length=1.6mm, Military Standard=Not, Number of Terminations=2, Packaging="Tape and Reel", Power Rating=100mW, Pricing 1="1 = 0,10000, 10 = 0,02300, 100 = 0,00940, 1000 = 0,00421, 2500 = 0,00366 (USD)", Resistance=14kR, RoHS=Yes, Stock 1=622097, Supplier 1=Digi-Key, Termination=SMD/SMT, Weight=7.1E-05oz, Width=0.031inch
R10: library part Resistor_Chip, "Ceramic, SMT Capacitor", Case/Package=0603, Case Code (Metric)=1608, Manufacturer=Yageo, Manufacturer Part Number=RC0603FR-0712K4L, Max Operating Temperature=155°C, Max Power Dissipation=100mW, Min Operating Temperature=-55°C, Package Quantity=1, Supplier Part Number 1=311-12.4KHRCT-ND, Temperature Coefficient=100ppm/°C, Tolerance=1%, Voltage Rating=50V, Working Voltage=75V, Case Code (Imperial)=0603, ComponentLink1Description=https://datasheet.ciiva.com/15189/getdatasheetpartid-325152-15189610.pdf?src-supplier=Verical, ComponentLink1URL=https://datasheet.ciiva.com/15189/getdatasheetpartid-325152-15189610.pdf?src-supplier=Verical, ComponentLink2Description=https://datasheet.ciiva.com/2455/pyu-r-int-thick-7-2455089.pdf?src-supplier=Digi-Key, ComponentLink2URL=https://datasheet.ciiva.com/2455/pyu-r-int-thick-7-2455089.pdf?src-supplier=Digi-Key, ComponentLink3Description=https://datasheet.ciiva.com/2455/pyu-r-int-thick-7-2455090.pdf?src-supplier=Digi-Key, ComponentLink3URL=https://datasheet.ciiva.com/2455/pyu-r-int-thick-7-2455090.pdf?src-supplier=Digi-Key, ComponentLink4Description=https://datasheet.ciiva.com/2455/pyu-r-int-thick-7-2455091.pdf?src-supplier=Digi-Key, ComponentLink4URL=https://datasheet.ciiva.com/2455/pyu-r-int-thick-7-2455091.pdf?src-supplier=Digi-Key, ComponentLink5Description=https://datasheet.ciiva.com/2455/pyu-r-int-thick-7-2455035.pdf?src-supplier=Digi-Key, ComponentLink5URL=https://datasheet.ciiva.com/2455/pyu-r-int-thick-7-2455035.pdf?src-supplier=Digi-Key, ComponentLink6Description=https://datasheet.ciiva.com/2455/pyu-r-int-thick-7-2455036.pdf?src-supplier=Digi-Key, ComponentLink6URL=https://datasheet.ciiva.com/2455/pyu-r-int-thick-7-2455036.pdf?src-supplier=Digi-Key, ComponentLink7Description=https://datasheet.ciiva.com/2455/pyu-r-int-thick-7-2455037.pdf?src-supplier=Digi-Key, ComponentLink7URL=https://datasheet.ciiva.com/2455/pyu-r-int-thick-7-2455037.pdf?src-supplier=Digi-Key, ComponentLink8Description=https://datasheet.ciiva.com/15189/getdatasheetpartid-406810-15189757.pdf?src-supplier=Verical, ComponentLink8URL=https://datasheet.ciiva.com/15189/getdatasheetpartid-406810-15189757.pdf?src-supplier=Verical, ComponentLink9Description=https://datasheet.ciiva.com/2454/pyu-r-int-thick-7-2454069.pdf?src-supplier=Digi-Key, ComponentLink9URL=https://datasheet.ciiva.com/2454/pyu-r-int-thick-7-2454069.pdf?src-supplier=Digi-Key, ComponentLink10Description=https://datasheet.ciiva.com/2454/pyu-r-int-thick-7-2454070.pdf?src-supplier=Digi-Key, ComponentLink10URL=https://datasheet.ciiva.com/2454/pyu-r-int-thick-7-2454070.pdf?src-supplier=Digi-Key, ComponentLink11Description=https://datasheet.ciiva.com/2454/pyu-r-int-thick-7-2454071.pdf?src-supplier=Digi-Key, ComponentLink11URL=https://datasheet.ciiva.com/2454/pyu-r-int-thick-7-2454071.pdf?src-supplier=Digi-Key, Composition="Thick Film", Depth=0.8mm, Features="Moisture Resistant", Height=0.022inch, Lead Free="Lead Free", Length=0.063inch, Military Standard=Not, Number of Terminations=2, Packaging="Tape and Reel", Power Rating=100mW, Pricing 1="1 = 0,10000, 10 = 0,02300, 100 = 0,00940, 1000 = 0,00421, 2500 = 0,00366 (USD)", Resistance=12.4kR, RoHS=Yes, Stock 1=851439, Supplier 1=Digi-Key, Termination=SMD/SMT, Voltage Rating (DC)=50V, Width=0.031inch
R17 R18: library part Resistor_Chip, "Ceramic, SMT Capacitor", Case/Package=0603, Case Code (Metric)=1608, Manufacturer=Yageo, Manufacturer Part Number=RC0603JR-0720RL, Max Operating Temperature=155°C, Max Power Dissipation=100mW, Min Operating Temperature=-55°C, Package Quantity=1, Supplier Part Number 1=311-20GRCT-ND, Temperature Coefficient=100ppm/°C, Tolerance=5%, Voltage Rating=75V, Voltage Rating (DC)=50V, Case Code (Imperial)=0603, ComponentLink1Description=https://datasheet.ciiva.com/2453/pyu-r-int-thick-7-2453211.pdf?src-supplier=Digi-Key, ComponentLink1URL=https://datasheet.ciiva.com/2453/pyu-r-int-thick-7-2453211.pdf?src-supplier=Digi-Key, ComponentLink2Description=https://datasheet.ciiva.com/2453/pyu-r-int-thick-7-2453212.pdf?src-supplier=Digi-Key, ComponentLink2URL=https://datasheet.ciiva.com/2453/pyu-r-int-thick-7-2453212.pdf?src-supplier=Digi-Key, ComponentLink3Description=https://datasheet.ciiva.com/2453/pyu-r-int-thick-7-2453213.pdf?src-supplier=Digi-Key, ComponentLink3URL=https://datasheet.ciiva.com/2453/pyu-r-int-thick-7-2453213.pdf?src-supplier=Digi-Key, Composition="Thick Film", Depth=0.8mm, Features="Moisture Resistant", Height=0.022inch, Lead Free="Lead Free", Length=1.6mm, Military Standard=Not, Number of Terminations=2, Packaging="Tape and Reel", Power Rating=100mW, Pricing 1="1 = 0,10000, 10 = 0,01900, 100 = 0,00770, 1000 = 0,00347, 2500 = 0,00301 (USD)", REACH SVHC=Unknown, Resistance=20R, RoHS=Yes, Stock 1=99734, Supplier 1=Digi-Key, Termination=SMD/SMT, Weight=7.1E-05oz, Width=0.8mm
R19 R20: library part Resistor_Chip, "Ceramic, SMT Capacitor", Case/Package=0603, Case Code (Metric)=1608, Manufacturer=Yageo, Manufacturer Part Number=RC0603FR-0710RL, Max Operating Temperature=155°C, Min Operating Temperature=-55°C, Power Rating=100mW, Supplier Part Number 1=311-10.0HRCT-ND, Temperature Coefficient=200ppm/°C, Tolerance=1%, Voltage Rating=50V, Case Code (Imperial)=0603, ComponentLink1Description=https://datasheet.ciiva.com/11808/0900766b80f96399-11808140.pdf?src-supplier=RSComponents, ComponentLink1URL=https://datasheet.ciiva.com/11808/0900766b80f96399-11808140.pdf?src-supplier=RSComponents, ComponentLink2Description=https://datasheet.ciiva.com/7746/443971-7746245.pdf?src-supplier=Element14, ComponentLink2URL=https://datasheet.ciiva.com/7746/443971-7746245.pdf?src-supplier=Element14, ComponentLink3Description=https://datasheet.ciiva.com/28386/pyu-rc0603-51-rohs-l-4-28386637.pdf?src-supplier=Avnet+Europe, ComponentLink3URL=https://datasheet.ciiva.com/28386/pyu-rc0603-51-rohs-l-4-28386637.pdf?src-supplier=Avnet+Europe, ComponentLink4Description=https://datasheet.ciiva.com/8891/pyu-rc0603-51-rohs-l-4-8891285.pdf?src-supplier=Avnet, ComponentLink4URL=https://datasheet.ciiva.com/8891/pyu-rc0603-51-rohs-l-4-8891285.pdf?src-supplier=Avnet, Composition="Thick Film", Contact Plating=Tin,Matte, Depth=0.8mm, Height=0.45mm, Lead Free="Lead Free", Length=1.6mm, Military Standard=Not, Number of Pins=2, Packaging="Tape and Reel", Pricing 1="1 = 0,10000, 10 = 0,04600, 100 = 0,01870, 1000 = 0,00840, 2500 = 0,00729 (USD)", Radiation Hardening=No, REACH SVHC="No SVHC", Resistance=10R, RoHS=Yes, Stock 1=10914948, Supplier 1=Digi-Key, Termination=SMD/SMT, Voltage Rating (DC)=50V, Width=0.8mm
R21 R22: library part Resistor_Chip, "Ceramic, SMT Capacitor", Case/Package=0603, Case Code (Metric)=1608, Manufacturer=Yageo, Manufacturer Part Number=RC0603FR-07220RL, Max Operating Temperature=155°C, Max Power Dissipation=100mW, Min Operating Temperature=-55°C, Package Quantity=1, Supplier Part Number 1=311-220HRCT-ND, Temperature Coefficient=100ppm/°C, Tolerance=1%, Voltage Rating=50V, Case Code (Imperial)=0603, ComponentLink1Description=https://datasheet.ciiva.com/2453/pyu-r-int-thick-7-2453973.pdf?src-supplier=Digi-Key, ComponentLink1URL=https://datasheet.ciiva.com/2453/pyu-r-int-thick-7-2453973.pdf?src-supplier=Digi-Key, ComponentLink2Description=https://datasheet.ciiva.com/2453/pyu-r-int-thick-7-2453974.pdf?src-supplier=Digi-Key, ComponentLink2URL=https://datasheet.ciiva.com/2453/pyu-r-int-thick-7-2453974.pdf?src-supplier=Digi-Key, ComponentLink3Description=https://datasheet.ciiva.com/2453/pyu-r-int-thick-7-2453975.pdf?src-supplier=Digi-Key, ComponentLink3URL=https://datasheet.ciiva.com/2453/pyu-r-int-thick-7-2453975.pdf?src-supplier=Digi-Key, ComponentLink4Description=https://datasheet.ciiva.com/7746/1738695-7746300.pdf?src-supplier=Element14, ComponentLink4URL=https://datasheet.ciiva.com/7746/1738695-7746300.pdf?src-supplier=Element14, ComponentLink5Description=https://datasheet.ciiva.com/7746/1738695-7746301.pdf?src-supplier=Element14, ComponentLink5URL=https://datasheet.ciiva.com/7746/1738695-7746301.pdf?src-supplier=Element14, Composition="Thick Film", Depth=0.8mm, Features="Moisture Resistant", Height=0.022inch, Lead Free="Lead Free", Length=1.6mm, Military Standard=Not, Number of Pins=2, Number of Terminations=2, Packaging="Tape and Reel", Power Rating=100mW, Pricing 1="1 = 0,10000, 10 = 0,02300, 100 = 0,00940, 1000 = 0,00421, 2500 = 0,00366 (USD)", REACH SVHC="No SVHC", Resistance=220R, RoHS=Yes, Stock 1=5261609, Supplier 1=Digi-Key, Termination=SMD/SMT, Voltage Rating (DC)=50V, Width=0.031inch
Y1: library part ASD1-1.544MHZ-EC-T, "OSC XO 1.544MHZ CMOS SMD", Frequency Stability=±25ppm, Manufacturer="ECS Inc.", Manufacturer Part Number=ECS-3225MV-240-CN-TR, Supplier Part Number 1=XC2884CT-ND, Voltage - Supply="1.62V ~ 3.63V", Base Resonator=Crystal, ComponentLink1Description=Datasheet, ComponentLink1URL=http://www.abracon.com/Oscillators/ASDseries.pdf, ComponentLink2Description="Digi-Key Listing", ComponentLink2URL=https://www.digikey.com/product-detail/en/ASD1-1.544MHZ-EC-T/535-9579-2-ND/1236896, ComponentLink3Description=https://www.ecsxtal.com/store/pdf/ECS-3225MV.pdf?src-supplier=Digi-Key, ComponentLink3URL=https://www.ecsxtal.com/store/pdf/ECS-3225MV.pdf?src-supplier=Digi-Key, Frequency=24MHz, Function=Enable/Disable, Output=HCMOS, Packaging="Cut Tape (CT)", Pricing 1="1 = 0,92000, 10 = 0,81700, 50 = 0,76380, 100 = 0,67510, 500 = 0,63954 (USD)", RoHS=No, Series=ECS-3225MV, Stock 1=1655, Supplier 1=Digi-Key, Type="XO (Standard)"

## Free pads (board coordinates)
  round 4 hole 2.5: ""(2.15,12.825) ""(52.45,12.475)

## Via types
v1: diameter 0.45, hole 0.2, L1 to L4, tented both sides, 112 vias

## Nets (pads, with @x,y where several pads share a name; then routed paths per layer and width w, separated by ;. In a path a pad name is that pad's centre, name@x,y a point inside that pad or via, vN(x,y) a via of type N, cw(c..) or ccw(c..) an arc to the next point about the centre after c; other vN are vias at no path point)
1v2: C2.2 C11.2 IC2.5 J1.10 | length 20.7
  L1 w0.1: v1(28.65,7.85) C2.2
  L1 w0.2: v1(33.35,13.8) C11.2 IC2.5
  L2 w0.1: v1(26.05,0.65) 27.625,2.225 27.625,3.633 28.65,4.658 v1(28.65,7.85)
  L2 w0.2: v1(28.65,7.85) 28.65,9.7 32.75,13.8 v1(33.35,13.8)
  L4 w0.1: v1(26.05,0.65) J1.10
2v8: C1.2 C14.2 IC3.4 J1.4 R10.2 | length 23.5
  L1 w0.1: v1(20.75,7.6) C1.2 ; v1(26.8,12.75) R10.2
  L1 w0.2: C14.2 C14.2@25.275,14.9 ; IC3.4 25.675,15.95 25.275,15.55 C14.2@25.275,14.9 ; R10.2 26.575,13.6 C14.2@25.275,14.9
  L2 w0.1: v1(23.05,0.65) 23.05,5.3 v1(20.75,7.6) 20.75,9.225 23.875,12.35 26.4,12.35 v1(26.8,12.75)
  L4 w0.1: v1(23.05,0.65) J1.4
3v: C3.2 C5.2 C7.2 C9.2 C12.2 C17.1 C18.1 C19.2 C20.2 D1.1 D2.1 IC1.4 IC2.1 IC2.3 IC3.1 IC3.3 IC4.9 IC4.13 IC5.9 IC5.13 J1.11 R4.2 R5.1 R6.2 R12.2 R13.2 R14.2 R15.2 R16.2 Y1.4 | length 72
  L1 w0.1: R13.2 v1(16.175,8.6) ; R14.2 v1(16.175,10.175) ; R12.2@15.55,6.975 R12.2 v1(16.175,7.025) ; R4.2 25.5,9.875 v1(25.5,10.6) ; v1(30.225,7.6) C3.2 v1(31.125,8.55) ; C5.2 v1(37.35,8.55) ; R5.1@36.55,12.8 R5.1 ; v1(38.45,9.925) R16.2 ; v1(38.475,8.35) R15.2
  L1 w0.2: IC3.3 25.675,18.775 26.25,19.35 26.675,18.925 IC3.1 ; C7.2 v1(33.375,20.375) ; Y1.4 36.325,8.775 C5.2 ; v1(40.325,18.9) 40.55,18.675 C20.2 C18.1 45.475,16.225 v1(46.5,15.2)
  L1 w0.3: v1(10.75,15.075) 12.15,16.475 C17.1 C19.2 v1(14.15,18.925) ; IC1.4 20,16.1 19.55,15.65 C9.2 19.6,14.8 20.8,13.6 R6.2 v1(21.125,12.925) ; v1(25.575,19.4) C12.2 ; IC2.3 32.05,19.675 C7.2@32.7,20.325 ; C7.2 C7.2@32.7,20.325 ; IC2.1 33.35,19.675 C7.2@32.7,20.325 ; v1(35.7,12.8) R5.1@36.55,12.8
  L2 w0.1: v1(26.35,2.625) 26.35,1.847 25.686,1.183 25.686,0.499 25.899,0.286 26.661,0.286 28.414,2.039 28.414,2.969 30.225,4.78 v1(30.225,7.6)
  L4 w0.1: v1(26.35,2.625) 26.55,2.425 J1.11
  L4 w0.2: v1(10.75,15.075) IC4.9@12.47,15.075 ; v1(39.575,19.4) D1.1 ; v1(46.5,15.2) 48.185,15.2 IC5.9 49.175,15.24 50.025,14.39 50.025,11.01 49.175,10.16 IC5.13 IC5.13@48.215,10.15
  L4 w0.3: v1(10.75,15.075) 10.75,15.048 10.286,14.584 10.286,10.429 10.725,9.99 IC4.13 ; v1(15.125,19.375) D2.1
5V: C6.2 IC1.3 J2.1 | length 19.9
  L1 w0.3: v1(19.325,19.4) C6.2 20.575,19.35 20,18.775 IC1.3 ; v1(22.05,4.5) J2.1
  L2 w0.3: v1@19.338,19.387 20.036,18.689 20.036,6.514 v1(22.05,4.5)
CAMERA_LIGHT: J2.21 R21.1 R22.1 | length 38
  L1 w0.2: R22.1 20.375,22.05 33.925,22.05 R21.1 34.8,21.125 37.85,18.075 37.85,7.925 37.025,7.1 32.535,7.1 32.05,6.615 J2.21
D0: J1.19 J2.2 | length 14.2
  L1 w0.1: J2.2 22.55,1.8 23.329,1.021 30.954,1.021 31.05,0.925 31.05,0.709 30.991,0.65 v1(30.55,0.65)
  L4 w0.1: v1(30.55,0.65) J1.19
D1: J1.21 J2.3 | length 14
  L1 w0.1: J2.3@23.05,5.375 23.05,2 23.84,1.21 31.59,1.21 31.8,1 31.8,0.75 31.7,0.65 v1(31.55,0.65)
  L4 w0.1: v1(31.55,0.65) J1.21
D2: J1.22 J2.4 | length 13.9
  L1 w0.1: J2.4 23.55,2.2 24.351,1.399 31.636,1.399 32.05,1.813 v1(32.05,2.55)
  L4 w0.1: J1.22 v1(32.05,2.55)
D3: J1.20 J2.5 | length 14.1
  L1 w0.1: J2.5 24.05,2.225 24.687,1.588 30.813,1.588 31.5,2.275 31.5,3.075 31.375,3.2 31.15,3.2 31.05,3.1 v1(31.05,2.55)
  L4 w0.1: J1.20 v1(31.05,2.55)
D4: J1.18 J2.6 | length 14.1
  L1 w0.1: J2.6 24.55,2.175 24.948,1.777 30.502,1.777 30.675,1.95 30.675,2.992 30.899,3.216 30.899,3.5 30.799,3.6 30.25,3.6 30.05,3.4 v1(30.05,2.55)
  L4 w0.1: J1.18 v1(30.05,2.55)
D5: J1.16 J2.7 | length 13.9
  L1 w0.1: J2.7 25.05,2.247 25.3,1.997 29.422,1.997 29.686,2.261 29.686,2.8 29.85,2.964 29.85,3.5 30.125,3.775 30.125,3.91 29.986,4.049 29.986,4.189 29.925,4.25 29.325,4.25 29.05,3.975 29.05,3.7 29.35,3.4 29.35,2.85 v1(29.05,2.55)
  L4 w0.1: J1.16 v1(29.05,2.55)
D6: J1.14 J2.8 | length 13.9
  L1 w0.1: J2.8 25.55,2.447 25.811,2.186 28.486,2.186 28.65,2.35 28.65,2.7 28.875,2.925 29.1,2.925 29.161,2.986 29.161,3.322 28.861,3.622 28.861,4.103 28.664,4.3 28.05,4.3 27.825,4.075 27.825,3.8 27.975,3.65 28.175,3.65 28.25,3.725 28.25,3.991 28.309,4.049 28.59,4.049 28.664,3.975 28.664,3.164 28.05,2.55 v1(28.05,2.574)
  L4 w0.1: J1.14 v1(28.05,2.574)
D7: J1.12 J2.9 | length 13.5
  L1 w0.1: J2.9 26.05,4.675 26.225,4.5 26.425,4.5 26.55,4.375 26.55,4.15 26.441,4.041 25.893,4.041 25.8,3.948 25.8,3.772 25.897,3.675 26.572,3.675 26.7,3.547 26.7,3.45 26.6,3.35 25.875,3.35 25.8,3.275 25.8,3.1 25.9,3 27.575,3 27.675,3.1 27.675,3.425 27.475,3.625 26.897,3.625 26.725,3.797 26.725,4.041 26.784,4.1 27.525,4.1 27.636,3.989 27.636,3.722 27.908,3.45 28.388,3.45 28.475,3.363 28.475,3.242 28.225,2.992 27.942,2.992 27.5,2.55 v1(27.05,2.55)
  L4 w0.1: J1.12 v1(27.05,2.55)
DCMI_HSYNC: J1.9 J2.12 | length 14
  L1 w0.1: J2.12 v1(27.55,6.4)
  L4 w0.1: J1.9 25.55,2.35 25.55,2.5 25.55,2.65 cw(c25.7,2.65) 25.7,2.8 25.952,2.8 ccw(c25.952,2.95) 26.102,2.95 ccw(c25.952,2.95) 25.952,3.1 25.7,3.1 cw(c25.7,3.25) 25.55,3.25 cw(c25.7,3.25) 25.7,3.4 26.175,3.4 ccw(c26.175,3.55) 26.325,3.55 ccw(c26.175,3.55) 26.175,3.7 25.7,3.7 cw(c25.7,3.85) 25.55,3.85 cw(c25.7,3.85) 25.7,4 26.175,4 ccw(c26.175,4.15) 26.325,4.15 ccw(c26.175,4.15) 26.175,4.3 25.7,4.3 cw(c25.7,4.45) 25.55,4.45 cw(c25.7,4.45) 25.7,4.6 26.175,4.6 ccw(c26.175,4.75) 26.325,4.75 ccw(c26.175,4.75) 26.175,4.9 25.7,4.9 cw(c25.7,5.05) 25.55,5.05 cw(c25.7,5.05) 25.7,5.2 26.175,5.2 ccw(c26.175,5.35) 26.325,5.35 ccw(c26.175,5.35) 26.175,5.5 25.625,5.5 cw(c25.625,5.575) 25.55,5.575 25.55,6.233 26.081,6.764 27.186,6.764 v1(27.55,6.4)
DCMI_NRST: C4.2 J1.6 J2.16 R4.1 | length 15.8
  L1 w0.1: v1(23.9,7.775) C4.2 R4.1 ; J2.16 v1(29.55,6.85)
  L4 w0.1: v1(23.9,7.775) v1@24.05,7.625 ; J1.6 v1@24.05,7.625 ; v1(29.55,6.85) 28.922,7.478 24.197,7.478 v1@24.05,7.625
DCMI_PIXCK: J1.17 J2.11 | length 14.2
  L1 w0.1: v1(27.05,4.5) J2.11
  L4 w0.1: v1(27.05,4.5) 27.641,4.5 27.75,4.391 27.75,4.275 27.675,4.2 26.575,4.2 26.525,4.15 26.525,3.9 26.575,3.85 29.45,3.85 29.55,3.75 29.55,3.475 29.45,3.375 26.725,3.375 26.642,3.292 26.642,3.033 26.725,2.95 29.425,2.95 29.55,2.825 J1.17
DCMI_PWREN: IC1.1 J2.17 | length 21.6
  L1 w0.1: IC1.1 v1(21.65,17.9) ; J2.17 30.05,4.5 v1(30.35,4.2)
  L4 w0.1: v1(21.65,17.9) 25.075,17.9 30.675,12.3 30.675,4.525 v1(30.35,4.2)
DCMI_SCL: IC4.3 IC5.3 J1.5 J2.14 R2.1 R13.1 R16.1 | length 45.8
  L1 w0.1: R2.1@22.325,8.525 v1(22.325,7.825) 22.825,7.325 28.165,7.325 28.55,6.94 J2.14
  L1 w0.2: v1(8.1,11.255) 10.755,8.6 R13.1 ; R16.1 40.55,9.975 40.875,10.3 42.725,10.3 v1(43.85,11.425)
  L4 w0.1: v1(22.325,7.825) 23.55,6.6 J1.5
  L4 w0.2: IC4.3@6.38,11.255 v1(8.1,11.255) 9.904,9.451 20.699,9.451 v1(22.325,7.825) ; IC5.3 42.13,11.425 v1(43.85,11.425)
DCMI_SDA: IC4.2 IC5.2 J1.3 J2.15 R1.1 R12.1 R15.1 | length 49
  L1 w0.1: R1.1 v1(19.175,7.85) 20.15,6.875 v1(24.975,6.875) ; v1(29.05,4.5) J2.15
  L1 w0.2: v1(8.1,9.985) 11.06,7.025 R12.1 ; R15.1 40.55,8.4 40.875,8.725 42.42,8.725 v1(43.85,10.155)
  L4 w0.1: v1@19.225,7.8 19.265,7.8 22.55,4.515 J1.3 ; v1(24.975,6.875) 25.389,7.289 28.379,7.289 29.05,6.618 v1(29.05,4.5)
  L4 w0.2: IC4.2@6.38,9.985 v1(8.1,9.985) 10.235,7.85 v1(19.175,7.85) v1@19.225,7.8 ; IC5.2@42.13,10.155 v1(43.85,10.155)
DCMI_VSYNC: J1.7 J2.13 | length 13.8
  L1 w0.1: J2.13 v1(28.05,6.925)
  L4 w0.1: J1.7 24.55,2.65 ccw(c24.4,2.65) 24.4,2.8 24.389,2.8 cw(c24.389,2.95) 24.239,2.95 cw(c24.389,2.95) 24.389,3.1 24.55,3.1 25.2,3.1 ccw(c25.2,3.25) 25.35,3.25 ccw(c25.2,3.25) 25.2,3.4 24.55,3.4 24.389,3.4 cw(c24.389,3.55) 24.239,3.55 cw(c24.389,3.55) 24.389,3.7 24.55,3.7 25.2,3.7 ccw(c25.2,3.85) 25.35,3.85 ccw(c25.2,3.85) 25.2,4 24.55,4 24.389,4 cw(c24.389,4.15) 24.239,4.15 cw(c24.389,4.15) 24.389,4.3 24.4,4.3 ccw(c24.4,4.45) 24.55,4.45 24.55,4.6 24.55,4.625 24.55,5.5 26.003,6.953 28.022,6.953 v1(28.05,6.925)
EXCLK: J1.13 Y1.3 | length 14.3
  L1 w0.1: v1(32.075,7.35) Y1.3 ; v1(32.325,0.5) 32.575,0.75 v1(32.575,3.825)
  L4 w0.1: J1.13 27.55,1.05 28.314,0.286 32.111,0.286 v1(32.325,0.5) ; v1(32.075,7.35) 32.075,5.075 32.575,4.575 v1(32.575,3.825)
GND: C1.1 C2.1 C3.1 C4.1 C5.1 C6.1 C7.1 C8.1 C9.1 C11.1 C12.1 C13.1 C14.1 C17.2 C18.2 C19.1 C20.1 C21.2 C22.2 IC1.2 IC1.7 IC2.2 IC3.2 IC3.7 IC4.6 IC5.5 IC5.6 IC6.2 IC7.2 J1.2 J1.15 J1.23 J1.24 J1.MP1 J1.MP2 J2.10 J2.22 J2.MP1 J2.MP2 pad. R3.1 R8.2 R11.2 R17.1 R18.1 R23.2 R24.2 Y1.2 | length 55.3
  L1 w0.1: C21.2 v1(16.175,11.75) ; C17.2 v1(16.175,16.475) ; C19.1 v1(16.175,18.05) ; IC7.2 18.725,23.175 v1(19.25,23.175) ; v1(19.55,12.775) C9.1 ; C1.1 v1(20.75,10.575) ; C6.1 v1(22.6,19.4) ; v1(22.7,12.925) R8.2 ; C8.1 v1(22.7,18.475) ; C4.1 v1(23.9,10.575) ; v1(25.225,12.875) C14.1 ; J2.10 v1(26.55,6.4) ; R3.1 v1(27.075,10.525) ; C12.1 v1(28.275,19.4) ; v1(28.375,12.925) R11.2 ; C13.1 v1(28.375,18.45) ; C2.1 v1(28.65,10.575) ; C3.1 v1(30.225,10.575) ; v1(31.325,14.75) C11.1 ; v1(32.1,11.35) Y1.2@32.1,10.5 ; J2.22 v1(32.55,6.4) ; v1(32.875,10.5) Y1.2@32.1,10.5 ; C5.1 v1(36.55,10.575) ; v1(37.325,23.025) IC6.2 ; v1(38.525,11.5) C22.2 ; v1(38.525,16.225) C18.2 ; v1(38.525,17.8) C20.1 ; Y1.2@32.1,10.5 Y1.2 Y1.2@32.1,10.5
  L1 w0.2: v1(10.85,13.075) 11.1,13.325 R17.1 ; R24.2 15.375,21.15 16.5,20.025 v1(17,20.025) ; v1(19.525,17.075) IC1.7@20.475,17.075 ; IC1.7 IC1.7@20.475,17.075 ; IC1.2 v1(20.5,18.55) ; v1(21.425,17.075) IC1.7@20.475,17.075 ; v1(25.225,17.1) IC3.7 v1(27.125,17.1) ; IC3.2 v1(26.175,18.525) ; IC2.2 v1(32.7,19.375) ; v1(38.85,19.275) 39.375,19.8 R23.2 ; R18.1 43.875,13.075 v1(44.125,13.325)
  L1 w0.3: v1(30.675,20.375) C7.1
  L4 w0.1: J1.2 v1(22.05,2.55) ; v1(28.55,0.65) J1.15
  L4 w0.2: v1(18.725,4.325) 19.096,3.954 19.096,3.529 J1.MP1 v1(21.625,2.85) ; J1.23 32.55,0.86 32.739,0.671 32.739,0.65 v1(33.05,0.65) J1.24 ; v1(32.975,2.85) J1.MP2 34.825,5.45 v1(34.325,5.95) ; IC5.5 44.145,13.97 v1(44.15,13.975) ; IC5.6 v1(44.15,15.24)
  L4 w0.3: IC4.6 v1(6.375,16.02)
NetC8_2: C8.2 IC1.6 | length 1.5
  L1 w0.2: IC1.6 C8.2@22.55,16.3
NetC13_2: C13.2 IC3.6 | length 1.8
  L1 w0.2: IC3.6 28.25,16.3 C13.2
NetC15_1: C15.1 R17.2 | length 1.6
  L1 w0.2: R17.2 C15.1
NetC15_2: C15.2 IC4.10 | length 5.6
  L1 w0.2: v1(10.75,13.805) 11.795,14.85 14.15,14.85 C15.2
  L4 w0.2: v1(10.75,13.805) IC4.10@12.47,13.805
NetC16_1: C16.1 R18.2 | length 1.6